# Altium PCB HnWrist.PcbDoc
Units mm, origin at the board's own origin, x right, y up, seen from the top; angles counter-clockwise.
Board outline 28.7 x 41.27 mm, 2 copper layers (Top Layer, Bottom Layer); 73 components, 55 nets, 292 pads, 87 vias.
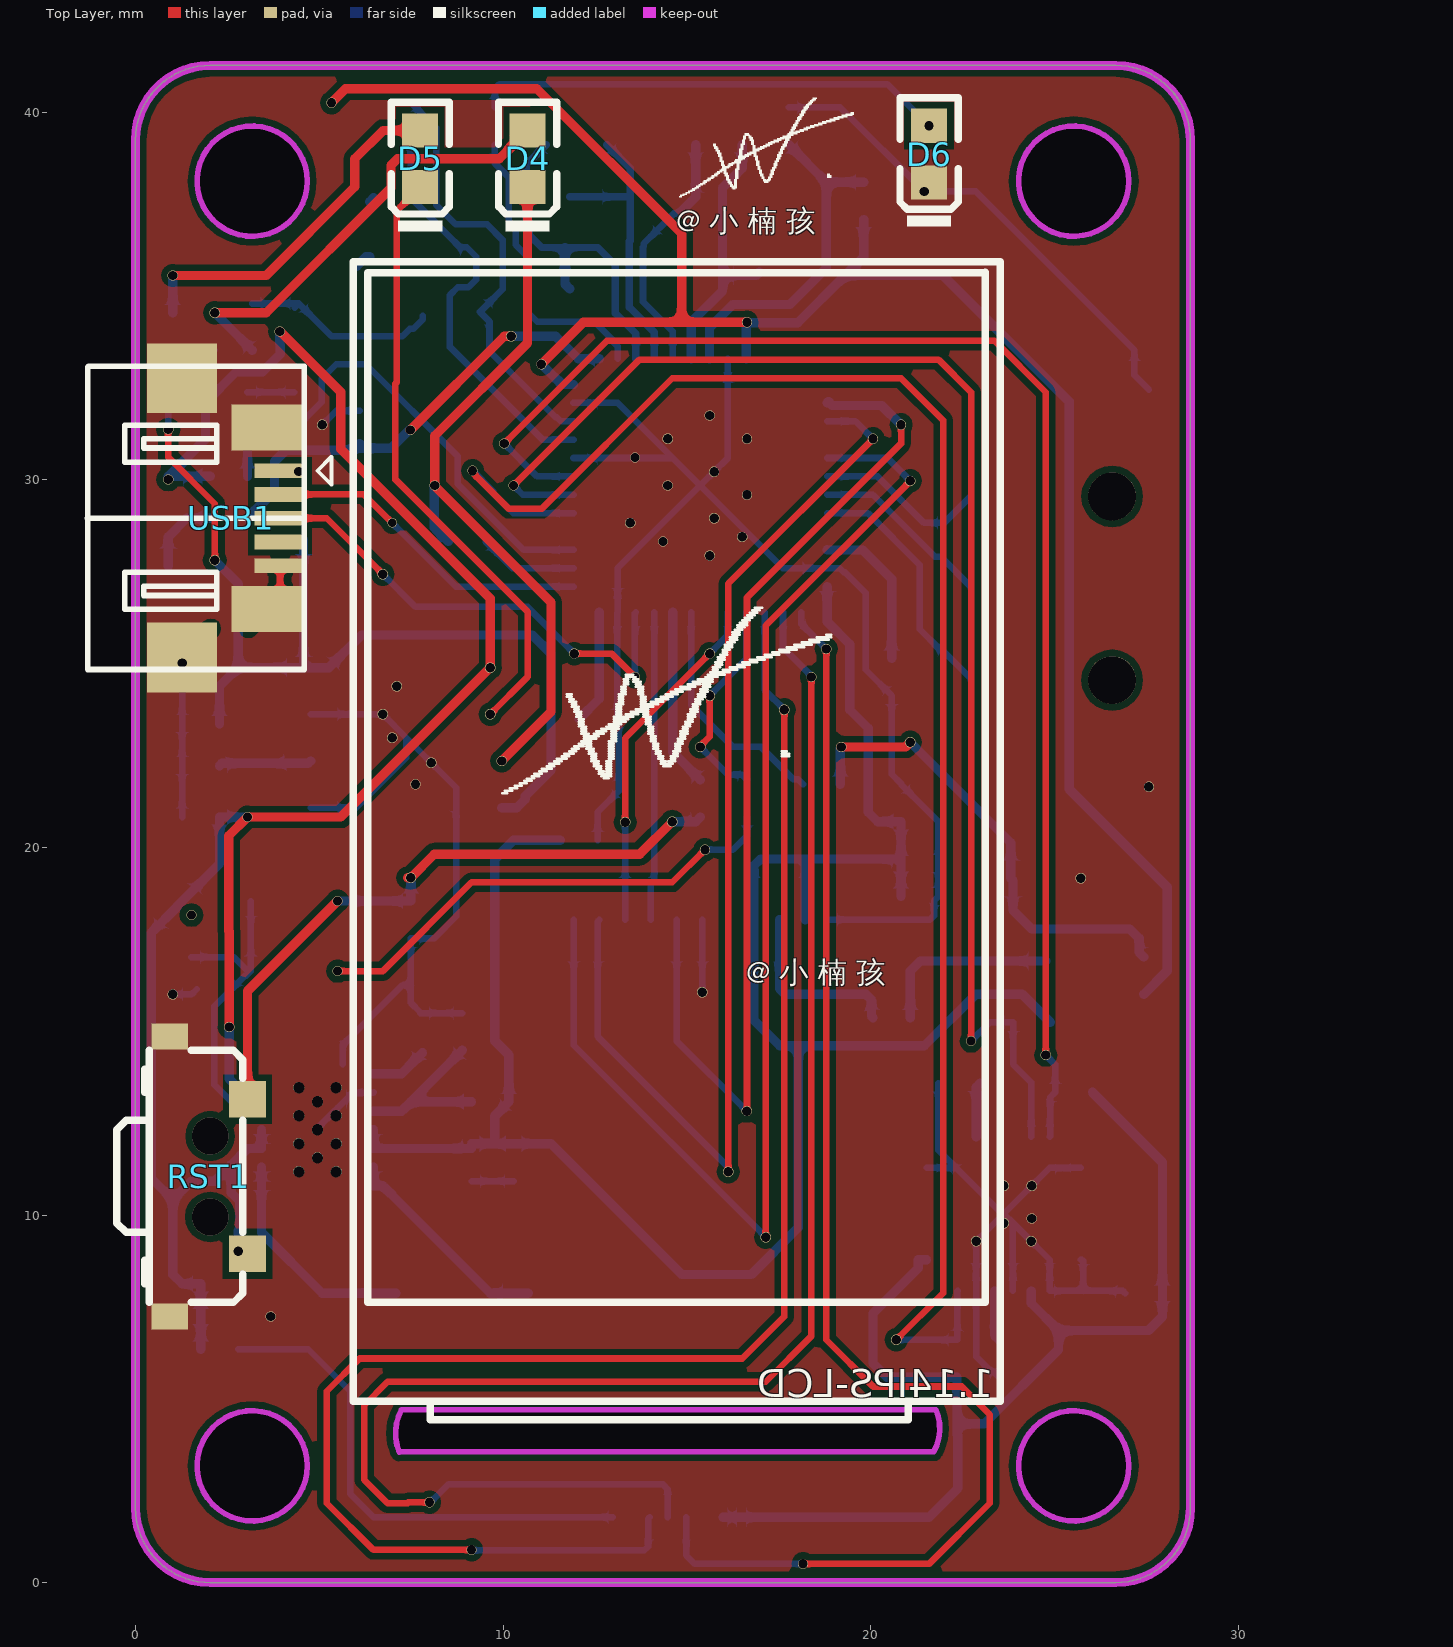
[diagram p0: Top Layer view]
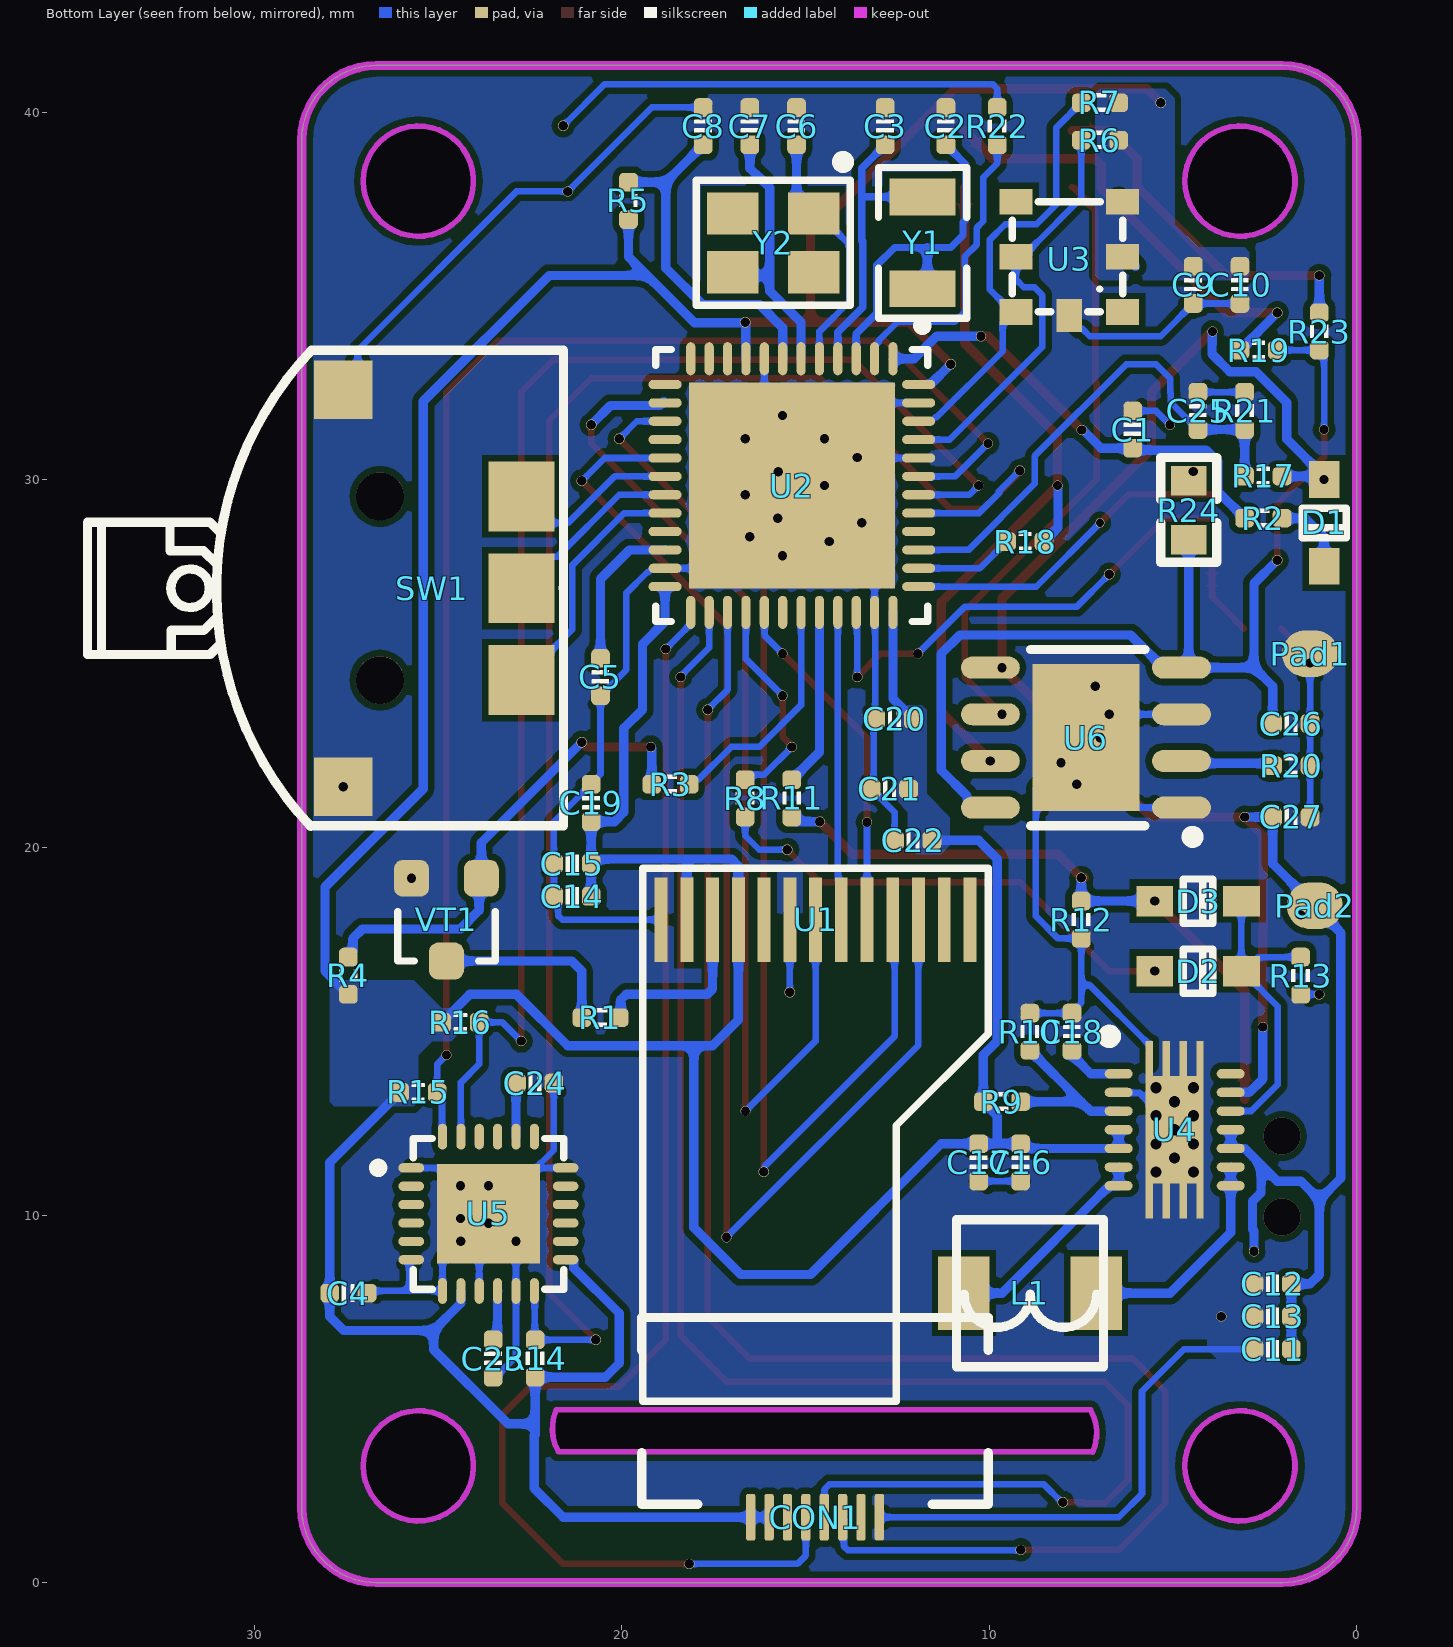
[diagram p1: Bottom Layer view, seen from below]
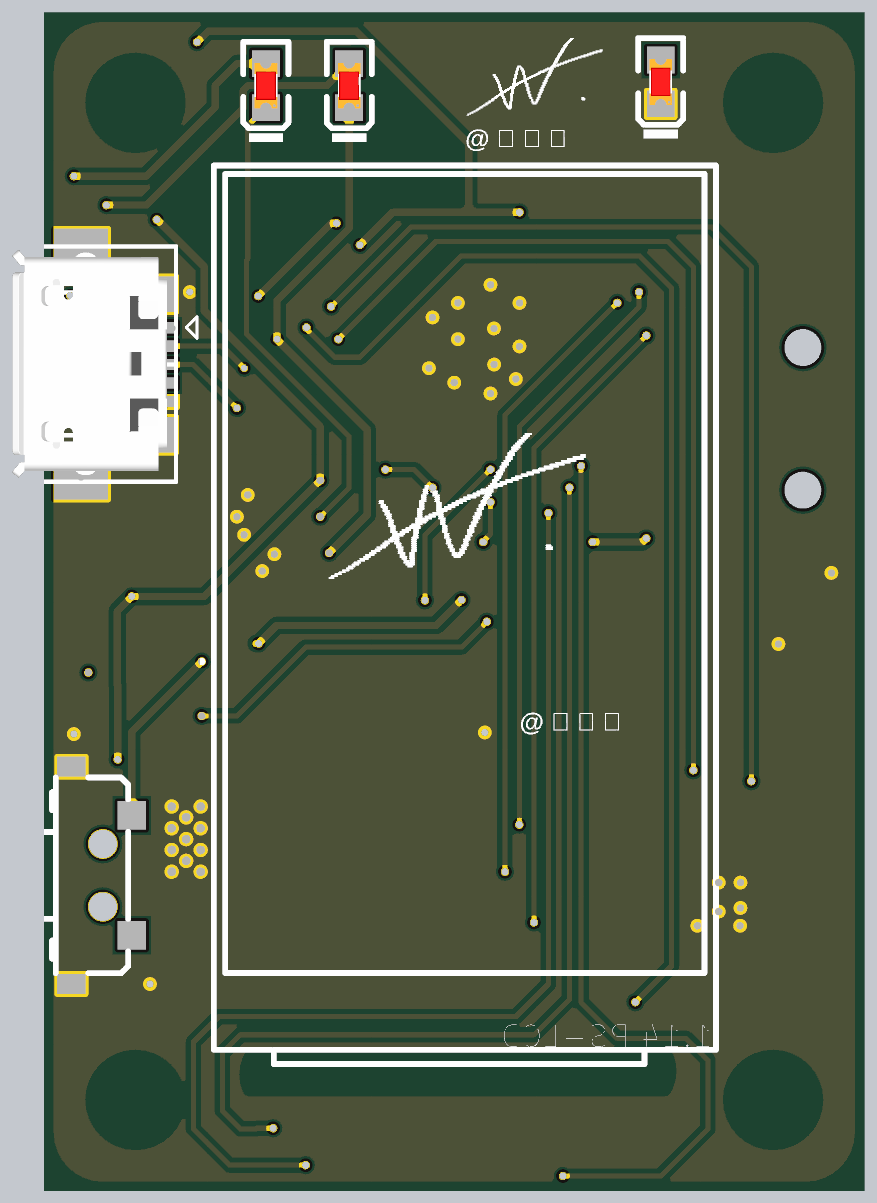
[diagram p2: 3D render of the assembled board from above, using the file's embedded part models]
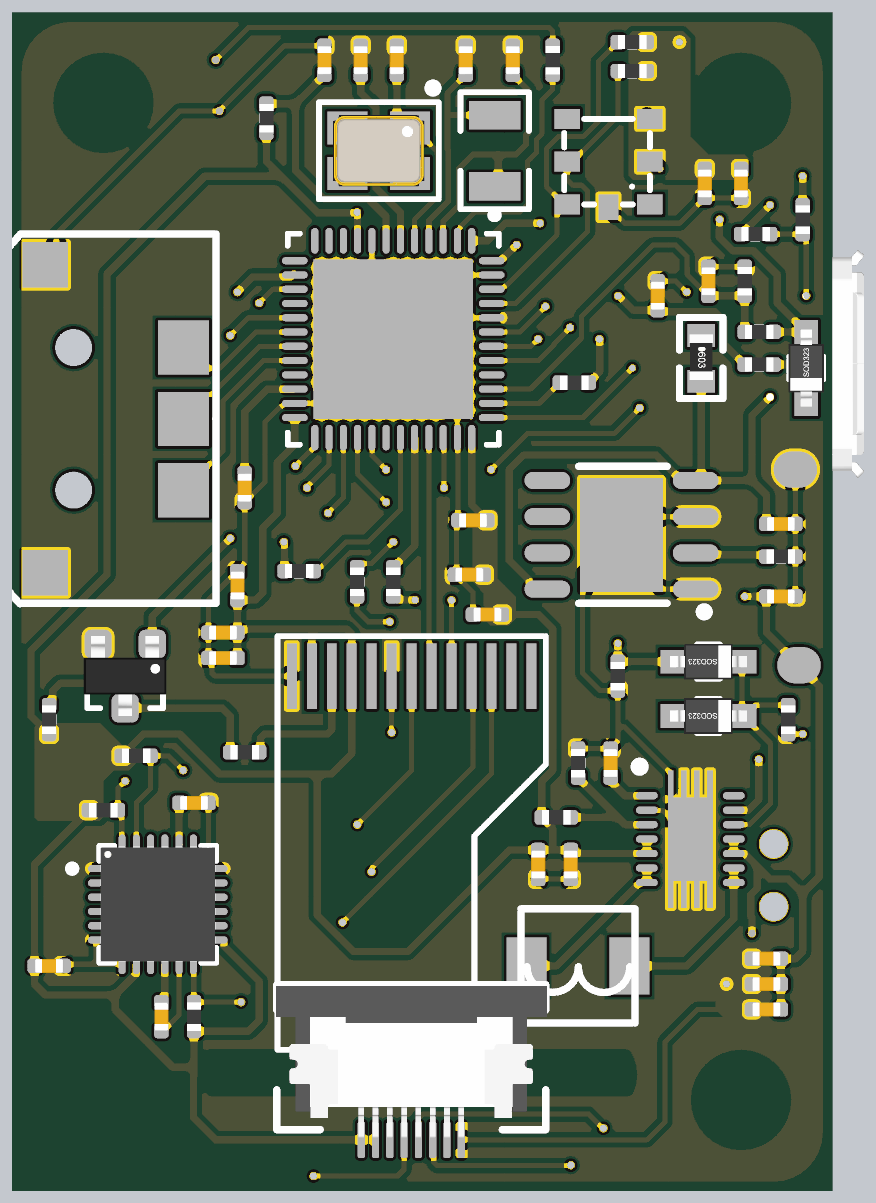
[diagram p3: 3D render of the assembled board from below, using the file's embedded part models]

## Layer stack, top to bottom
Top Solder: solder mask 0.0102, Solder Resist, Dk 3.5
Top Layer: signal copper 0.0356
Dielectric 1: dielectric 0.32, FR-4, Dk 4.8
Bottom Layer: signal copper 0.0356
Bottom Solder: solder mask 0.0102, Solder Resist, Dk 3.5

## Board outline
0,2.032 ccw(c2.032,2.032) 2.032,0 26.67,0 ccw(c26.67,2.032) 28.702,2.032 28.702,39.243 ccw(c26.67,39.243) 26.67,41.275 2.032,41.275 ccw(c2.032,39.243) 0,39.243
cut-out: 1.675,3.175 ccw(c3.175,3.175) 3.175,1.675 ccw(c3.175,3.175) 4.675,3.175 ccw(c3.175,3.175) 3.175,4.675 ccw(c3.175,3.175)
cut-out: 24.027,38.127 ccw(c25.527,38.127) 25.527,36.627 ccw(c25.527,38.127) 27.027,38.127 ccw(c25.527,38.127) 25.527,39.627 ccw(c25.527,38.127)
cut-out: 3.175,36.627 cw(c3.175,38.127) 1.675,38.127 cw(c3.175,38.127) 3.175,39.627 cw(c3.175,38.127) 4.675,38.127 cw(c3.175,38.127)
cut-out: 24.027,3.175 ccw(c25.527,3.175) 25.527,1.675 ccw(c25.527,3.175) 27.027,3.175 ccw(c25.527,3.175) 25.527,4.675 ccw(c25.527,3.175)
cut-out: 7.179,3.552 cw(c8.382,4.064) 7.239,4.699 21.717,4.699 21.777,4.703 cw(c20.574,4.191) 21.717,3.556
cut-out: 7.239,4.699 21.774,4.699 21.777,4.703

## Design rules (kind name [scope] priority, off if disabled: settings)
Clearance [All] p1: gap=0.178 ignorepadtopadclearanceinfootprint=FALSE except(0: Arc-Hole Track-Hole SMDPad-Hole THPad-Hole Via-Hole Fill-Hole Poly-Hole Region-Hole Text-Hole)
HoleSize [All] p1: absolutevalues=TRUE maxlimit=5.08 minlimit=0.305 maxpercent=80.000 minpercent=20.000
HoleToHoleClearance [All] p1: gap=0.305 allowstackedmicrovias=TRUE
MinimumSolderMaskSliver [All] p1: minsoldermaskwidth=0.305
PlaneConnect [All] p1: planeconnectstyle=Direct reliefexpansion=0.508 reliefentries=4 reliefconductorwidth=0.254 reliefairgap=0.254
PolygonConnect [All] p1: connectstyle=Direct reliefconductorwidth=0.254 reliefentries=4 polygonreliefangle="90 Angle" airgapwidth=0.254
RoutingVias [All] p1: holewidth=0.305 width=0.33 viastyle="Through Hole" minholewidth=0.305 minwidth=0.305 maxholewidth=5.08 maxwidth=5.08
SolderMaskExpansion [All] p1: expansion=0.102 istentingtop=FALSE
Width [All] p1: maxlimit=2.54 minlimit=0.178 preferedwidth=0.203
26 further rules are at their usual default settings.

## Classes and differential pairs
net class GND: GND
net class PWR: 3V3 BAT BAT_CHG BAT_DET USB_VCC

## Components (designator, comment, footprint, x,y, rotation, side; value= is the part's Value field where it differs from the comment)
C1 "104" CAP_0402 6.096,31.369 r270 bottom value=0.1u
C2 "22pF" CAP_0402 11.176,39.624 r270 bottom value=0.1u
C3 "22pF" CAP_0402 12.827,39.624 r270 bottom value=0.1u
C4 "1uF" CAP_0402 27.432,7.874 r0 bottom value=0.1u
C5 "4.7uF" CAP_0402 20.574,24.638 r90 bottom value=0.1u
C6 "22pF" CAP_0402 15.24,39.624 r270 bottom value=0.1u
C7 "22pF" CAP_0402 16.51,39.624 r270 bottom value=0.1u
C8 "104" CAP_0402 17.78,39.624 r270 bottom value=0.1u
C9 "4.7uF" CAP_0402 4.445,35.306 r90 bottom value=0.1u
C10 "104" CAP_0402 3.175,35.306 r90 bottom value=0.1u
C11 "106" CAP_0402 2.286,6.35 r0 bottom value=0.1u
C12 "106" CAP_0402 2.286,8.128 r0 bottom value=0.1u
C13 "106" CAP_0402 2.286,7.239 r0 bottom value=0.1u
C14 "106" CAP_0402 21.336,18.669 r0 bottom value=0.1u
C15 "22uF" CAP_0402 21.336,19.558 r0 bottom value=0.1u
C16 "22uF" CAP_0402 9.144,11.43 r270 bottom value=0.1u
C17 "104" CAP_0402 10.287,11.43 r270 bottom value=0.1u
C18 "104" CAP_0402 7.747,14.986 r270 bottom value=0.1u
C19 "1uF" CAP_0402 20.828,21.209 r90 bottom value=0.1u
C20 "1uF" CAP_0402 12.573,23.495 r180 bottom value=0.1u
C21 "1uF" CAP_0402 12.7,21.59 r180 bottom value=0.1u
C22 "1uF" CAP_0402 12.065,20.193 r0 bottom value=0.1u
C23 "104" CAP_0402 23.495,6.096 r90 bottom value=0.1u
C24 "2.2nF" CAP_0402 22.352,13.589 r0 bottom value=0.1u
C25 "104" CAP_0402 4.318,31.877 r90 bottom value=0.1u
C26 "106" CAP_0402 1.778,23.368 r0 bottom value=0.1u
C27 "106" CAP_0402 1.778,20.828 r0 bottom value=0.1u
CON1 "MAX30102" FFC_0.5_8 14.736,4.039 r0 bottom
D1 "1N4148" LC-SOD-323 0.889,28.829 r90 bottom
D2 "1N4148" LC-SOD-323 4.318,16.637 r0 bottom
D3 "1N4148" LC-SOD-323 4.318,18.542 r0 bottom
D4 "红灯 0603" LC-0603_LED_S1 10.668,38.735 r90 top
D5 "绿灯 0603" LC-0603_LED_S1 7.747,38.735 r90 top
D6 "红灯 0603" LC-0603_LED_S1 21.59,38.862 r90 top
L1 "1.5uH" 变压器电感_0420 8.89,7.874 r90 bottom locked
Pad1 "BAT" PAD_A 1.27,25.273 r180 bottom
Pad2 "BAT" PAD_A 1.143,18.415 r180 bottom
R1 "10R" RES_0402 20.574,15.367 r0 bottom value=22R
R2 "10K" RES_0402 2.54,28.956 r180 bottom value=22R
R3 "1K" RES_0402 18.669,21.717 r180 bottom value=22R
R4 "20K" RES_0402 27.432,16.51 r270 bottom value=22R
R5 "47K" RES_0402 19.812,37.592 r270 bottom value=22R
R6 "4.7K" RES_0402 6.985,39.243 r180 bottom value=22R
R7 "4.7K" RES_0402 6.985,40.259 r180 bottom value=22R
R8 "4.7K" RES_0402 16.637,21.336 r90 bottom value=22R
R9 "1M" RES_0402 9.652,13.081 r180 bottom value=22R
R10 "180K" RES_0402 8.89,14.986 r90 bottom value=22R
R11 "20K" RES_0402 15.367,21.336 r270 bottom value=22R
R12 "20K" RES_0402 7.493,18.034 r270 bottom value=22R
R13 "1M" RES_0402 1.524,16.51 r270 bottom value=22R
R14 "10K" RES_0402 22.352,6.096 r270 bottom value=22R
R15 "10K" RES_0402 25.527,13.335 r0 bottom value=22R
R16 "10K" RES_0402 24.384,15.24 r0 bottom value=22R
R17 "20K" RES_0402 2.54,30.099 r0 bottom value=22R
R18 "2K" RES_0402 9.017,28.321 r180 bottom value=22R
R19 "2K" RES_0402 2.667,33.528 r180 bottom value=22R
R20 "2K" RES_0402 1.778,22.225 r180 bottom value=22R
R21 "20K" RES_0402 3.048,31.877 r90 bottom value=22R
R22 "1K" RES_0402 9.779,39.624 r90 bottom value=22R
R23 "10K" RES_0402 1.016,34.036 r90 bottom value=22R
R24 "0R" 0603R 4.572,29.972 r270 bottom value=22R
RST1 "KEY" 侧面按键3*6*3.5 2.032,11.049 r90 top locked
SW1 "三档拨轮开关" SW-SMD 25.146,27.051 r90 bottom locked
U1 "IPS-LCD" 1.14IPS-LCD 31.923,11.334 r270 top locked
U2 "STM32F401CCU6" STM-UFQFPN48_N 15.367,29.845 r270 bottom locked
U3 "BMP180" LGA-7 11.371,33.568 r270 bottom locked
U4 "TPS63020" TPS63020 4.953,12.319 r270 bottom locked
U5 "MPU6050" QFN-24 23.622,10.033 r180 bottom
U6 "TP4056" LC-SOP-8_EP_150MIL 7.366,22.987 r90 bottom
USB1 "Micro-USB" USB-MICRO_A 3.937,30.251 r270 top locked
VT1 "S8050" SMT_TRIODE_NPN 24.765,18.034 r0 bottom
Y1 "32.768KHz" "LC-SMD-3215_2P FC - 135" 11.811,36.449 r90 bottom
Y2 "25MHZ" LC-SMD-3225_4P 15.875,36.449 r0 bottom locked

## Footprints (in the part's own frame and the unit in brackets; to place one, negate y for a bottom-side part, rotate by r counter-clockwise, add the part's x,y. Pads: shape width x height; smd on the part's side, far side on the other; paste and mask are expansions set on the pad)
1.14IPS-LCD [mm] "1.14寸IPS-LCD裸屏SPI接口"
  rect 2.3x0.35 smd far side: 1(-6.7,-21.4) 2(-6.7,-20.7) 3(-6.7,-20) 4(-6.7,-19.3) 5(-6.7,-18.6) 6(-6.7,-17.9) 7(-6.7,-17.2) 8(-6.7,-16.5) 9(-6.7,-15.8) 10(-6.7,-15.1) 11(-6.7,-14.4) 12(-6.7,-13.7) 13(-6.7,-13)
  silkscreen extent -24.6,-26 6.9,-8.4
0603R [mm]
  rect 0.8x0.965 smd: 1(0,0) 2(1.6,0)
  silkscreen extent -0.64,-0.76 2.21,0.76, body extent -0.04,-0.41 1.56,0.41, height 0.45
CAP_0402 [mil]
  rrect50% 20x20 smd: 1(-20,0) 2(20,0)
  silkscreen extent -7,-9 7,9, body extent -20,-10 20,10, height 20
FFC_0.5_8 [mil]
  rrect50% 10x50 smd: 1(-68.9,89) 2(-49.21,89) 3(-29.53,89) 4(-9.84,89) 5(9.84,89) 6(29.53,89) 7(49.21,89) 8(68.9,89)
  silkscreen extent -186,-125 186,75, body extent -187,-124 187,87, height 82
LC-0603_LED_S1 [mm]
  rect 0.93x0.98 smd: A(0.77,0) K(-0.77,0)
  silkscreen extent -1.97,-0.79 1.54,0.79, body extent -0.8,-0.4 0.8,0.4, height 0.6
"LC-SMD-3215_2P FC - 135" [mm]
  rect 1x1.8 smd: 1(-1.25,0) 2(1.25,0)
  silkscreen extent -2.05,-1.2 2.05,1.2
LC-SMD-3225_4P [mm]
  rect 1.4x1.15 smd: 1(-1.1,-0.8) 2(1.1,-0.8) 3(1.1,0.8) 4(-1.1,0.8)
  silkscreen extent -2.1,-2.35 2.1,1.7, body extent -1.6,-1.25 1.6,1.25, height 0.61
LC-SOD-323 [mm]
  rect 1x0.83 smd: 1(1.18,0) 2(-1.18,0)
  silkscreen extent -0.4,-0.6 0.4,0.6, body extent -1.35,-0.63 1.35,0.63, height 1.1
LC-SOP-8_EP_150MIL [mm]
  rect 4x2.9 smd: 0(0,0)
  oval 0.6x1.6 smd: 1(-1.905,-2.6) 2(-0.635,-2.6) 3(0.635,-2.6) 4(1.905,-2.6) 5(1.905,2.6) 6(0.635,2.6) 7(-0.635,2.6) 8(-1.905,2.6)
  silkscreen extent -2.85,-3.05 2.4,1.5
LGA-7 [mm] "LGA-7Pin"
  rect 0.7x0.9 smd: 1(-1,5) 2(-2.5,5) 3(-4,5) 4(-4,2.1) 5(-2.5,2.1) 6(-1,2.1)
  rect 0.9x0.7 smd: 7(-0.9,3.55)
  silkscreen extent -4,2 -1,5
PAD_A [mil]
  oval 60x50 smd: 1(0,0)
QFN-24 [mm]
  oval 0.7x0.25 smd: 1(-2.1,1.25) 2(-2.1,0.75) 3(-2.1,0.25) 4(-2.1,-0.25) 5(-2.1,-0.75) 6(-2.1,-1.25) 13(2.1,-1.25) 14(2.1,-0.75) 15(2.1,-0.25) 16(2.1,0.25) 17(2.1,0.75) 18(2.1,1.25)
  oval 0.25x0.7 smd: 7(-1.25,-2.1) 8(-0.75,-2.1) 9(-0.25,-2.1) 10(0.25,-2.1) 11(0.75,-2.1) 12(1.25,-2.1) 19(1.25,2.1) 20(0.75,2.1) 21(0.25,2.1) 22(-0.25,2.1) 23(-0.75,2.1) 24(-1.25,2.1)
  rect 2.8x2.7 smd: ""(0,0)
  silkscreen extent -3.13,-2.05 2.05,2.05, body extent -2.02,-2.02 2.02,2.02, height 0.95
RES_0402 [mil]
  rrect50% 20x20 smd: 1(-20,0) 2(20,0)
  silkscreen extent -6,-10 6,10, body extent -20,-10 20,10, height 14
SMT_TRIODE_NPN [mm]
  rrect50% 0.95x1 smd: 1(-0.95,-1.125) 2(0.95,-1.125) 3(0,1.125)
  silkscreen extent -1.33,-0.22 1.32,1.13, body extent -1.45,-1.4 1.45,1.4, height 1.3
STM-UFQFPN48_N [mm] "QFN, 48-Leads, Body 7.1x7.1mm, Pitch 0.5mm, Thermal Pad 5.6x5.6mm, IPC Medium Density"
  oval 0.9x0.25 smd: 1(-3.45,2.75) 2(-3.45,2.25) 3(-3.45,1.75) 4(-3.45,1.25) 5(-3.45,0.75) 6(-3.45,0.25) 7(-3.45,-0.25) 8(-3.45,-0.75) 9(-3.45,-1.25) 10(-3.45,-1.75) 11(-3.45,-2.25) 12(-3.45,-2.75) 25(3.45,-2.75) 26(3.45,-2.25) 27(3.45,-1.75) 28(3.45,-1.25) 29(3.45,-0.75) 30(3.45,-0.25) 31(3.45,0.25) 32(3.45,0.75) 33(3.45,1.25) 34(3.45,1.75) 35(3.45,2.25) 36(3.45,2.75)
  oval 0.25x0.9 smd: 13(-2.75,-3.45) 14(-2.25,-3.45) 15(-1.75,-3.45) 16(-1.25,-3.45) 17(-0.75,-3.45) 18(-0.25,-3.45) 19(0.25,-3.45) 20(0.75,-3.45) 21(1.25,-3.45) 22(1.75,-3.45) 23(2.25,-3.45) 24(2.75,-3.45) 37(2.75,3.45) 38(2.25,3.45) 39(1.75,3.45) 40(1.25,3.45) 41(0.75,3.45) 42(0.25,3.45) 43(-0.25,3.45) 44(-0.75,3.45) 45(-1.25,3.45) 46(-1.75,3.45) 47(-2.25,3.45) 48(-2.75,3.45)
  rect 5.6x5.6 smd: 49(0,0)
  silkscreen extent -4.47,-3.7 3.7,3.7, body extent -3.55,-3.55 3.55,3.55, height 0.6
SW-SMD [mm]
  rect 1.6x1.6 smd: a(-5.4,2.425) a(5.4,2.425)
  rect 1.9x1.8 smd: b(2.5,-2.425) c(0,-2.425) d(-2.5,-2.425)
  round 1.3 hole 1.3 unplated: ""(-2.5,1.425) ""(2.5,1.425)
  silkscreen extent -6.48,-3.57 6.48,9.39
TPS63020 [mil] "High Efficiency Single Inductor Buck-Boost Converter With 4-A Switches"
  oval 10x30 smd: 1(-60,-60) 2(-40,-60) 3(-20,-60) 4(0,-60) 5(20,-60) 6(40,-60) 7(60,-60) 8(60,60) 9(40,60) 10(20,60) 11(0,60) 12(-20,60) 13(-40,60) 14(-60,60)
  rect 50x7.87 smd: 15(-70,-27.17) 15(-70,-9.06) 15(-70,9.06) 15(-70,27.17) 15(70,-27.17) 15(70,-9.06) 15(70,9.06) 15(70,27.17)
  round 11.81 hole 11.81: 15(-45,-20) 15(-45,20) 15(-30,0) 15(-15,-20) 15(-15,20) 15(0,0) 15(15,-20) 15(15,20) 15(30,0) 15(45,-20) 15(45,20)
  rect 115x62.2 smd: 15(0,0)
  silkscreen extent -105,-75 -95,-65, body extent -85,-65 85,65, height 30
USB-MICRO_A [mm]
  rect 1.9x1.9 smd: 0(-2.515,-2.667) 0(5.08,-2.667)
  rect 0.4x1.4 smd: 1(0,0) 2(0.648,0) 3(1.295,0) 4(1.943,0) 5(2.591,0)
  rect 1.25x2 smd: 5(-1.168,-0.33) 5(3.759,-0.33)
  silkscreen extent -2.84,-5.24 5.41,1.4, body extent -2.71,-5.08 5.25,0.34, height 2.69
侧面按键3*6*3.5 [mm]
  rect 1x1 smd: 1(-2.1,-1.016) 2(2.1,-1.016)
  rect 0.7x1 smd: 4(-3.81,1.1) 5(3.81,1.1)
  silkscreen extent -3.43,-0.89 3.43,2.54, body extent -3.43,-0.89 3.43,1.65, height 4
变压器电感_0420 [mm]
  rect 2x1.4 smd: 1(0,-1.8) 2(0,1.8)
  silkscreen extent -2,-2 2,2

## Part data
C1 C2 C3 C4 C5 C6 C7 C8 C9 C10 C11 C12 C13 C14 C15 C16 C17 C18 C19 C20 C21 C22 C23 C24 C25 C26 C27: library part 电容-0402, "Capacitor"
CON1: library part FFC_0.5_8, System=Connector
D1 D2 D3: library part "SOD-323 1N4148WS T4", "二极管", Package=SOD-323, SuppliersPartNumber=C2128, ComponentLink1Description=供应商链接, ComponentLink1URL=http://www.szlcsc.com/product/details_2485.html, Supplier=LC
D4 D6: library part "0603 红灯", "发光二极管", Package=0603, SuppliersPartNumber=C2286, ComponentLink1Description=供应商链接, ComponentLink1URL=http://www.szlcsc.com/product/details_2659.html, Supplier=LC
D5: library part "0603 绿灯", "发光二极管", Package=0603, SuppliersPartNumber=C72043, ComponentLink1Description=供应商链接, ComponentLink1URL=http://www.szlcsc.com/product/details_73152.html, Supplier=LC
L1: library part "Inductor Iron 2", _Current=10A, _Accuracy=20%, _Comma=,, _Footprint=1040, _Name=IND, _Specification=IND,1040,1.5uH,10A,20%, _Value=1.5uH
Pad1 Pad2: library part Pad, _Comma=,, _Funcyusa=Test, _Name=Pad, _Remarks=BAT, _Specification=Pad,Test,BAT
R1 R2 R3 R4 R5 R6 R7 R8 R9 R10 R11 R12 R13 R14 R15 R16 R17 R18 R19 R20 R21 R22 R23 R24: library part 电阻-0402, "Resistor"
RST1: library part SW-PB, "按键"
SW1: library part 拨轮开关, "拨轮开关", BOM_JLCPCB Part Class="Extended Part", BOM_Manufacturer="XKB Enterprise", BOM_Manufacturer Part=TM-2022-3, BOM_Supplier=LCSC, BOM_Supplier Part=C318952, Contributor=LCSC, spicePre=S, spiceSymbolName=TM-2022-3
U1: library part IPS-LCD-1.14, "IPS-LCD-1.14寸裸屏spi接口"
U2: "ARM Cortex-M4 32-bit MCU+FPU, 105 DMIPS, 256 kB Flash, 64 kB Internal RAM, 36 I/Os, 48-pin UFQFPN, -40 to 85 degC, Tray", I/Os (High Current)=36, Manufacturer=STMicroelectronics, Operating Frequency(F) (Processor speed) (MHz)=84, Supplier Part Number 1=19X6217, Supply Voltage(Vcc) max (V)=3.6, Supply Voltage(Vcc) min (V)=1.8, ComponentLink1Description="Manufacturer URL", ComponentLink1URL=http://www.st.com/web/en/home.html, ComponentLink2Description=Datasheet, ComponentLink2URL=http://www.st.com/st-web-ui/static/active/en/resource/technical/document/data_brief/DM00071938.pdf, ComponentLink3Description="Package Specification", ComponentLink3URL=http://www.st.com/st-web-ui/static/active/en/resource/technical/document/data_brief/DM00071938.pdf, Core="ARM Cortex-M4", DatasheetVersion="Rev. 1", FLASH Size (Prog) (kB)=256, Internal RAM Size (kB)=64, Mounting Technology="Surface Mount", PackageDescription="48-Pin Ultra Thin Fine Pitch Quad Flat No-Lead, 7 x 7 x 0.6 mm Body, 0.5 mm Pitch, Exposed Pad", PackageReference=UFQFPN48, PackageVersion="Rev. 1, 04/2013", Packing=Tray, PartNumber=STM32F401CCU6, Supplier 1=Newark, Supplier 2=Mouser, Supplier Part Number 2=511-STM32F401CCU6
U3: "数字气压传感器"
U5: "六轴传感器"
U6: "电池电源管理", Package=SOP-8_EP_150mil, SuppliersPartNumber=C16581, ComponentLink1Description=供应商链接, ComponentLink1URL=http://www.szlcsc.com/product/details_17264.html, Supplier=LC
VT1: library part SMT_TRIODE_NPN, "Surface mount NPN transistor, package SOT-23"
Y1: library part "SMD-3215_2P 32.768KHz 20ppm 12.5pF", "贴片晶振", Package=SMD-3215_2P, SuppliersPartNumber=C32346, ComponentLink1Description=供应商链接, ComponentLink1URL=http://www.szlcsc.com/product/details_33310.html, Supplier=LC
Y2: library part "SMD-3225_4P  25MHZ 12PF 10PPM", "贴片晶振", Package=SMD-3225_4P, SuppliersPartNumber=C9006, ComponentLink1Description=供应商链接, ComponentLink1URL=http://www.szlcsc.com/product/details_9526.html, Supplier=LC

## Via types
v1: diameter 0.279, hole 0.254, Top Layer to Bottom Layer, 84 vias
v2: diameter 1, hole 1, Top Layer to Bottom Layer, 2 vias
v3: diameter 0.254, hole 0.229, Top Layer to Bottom Layer, 1 vias

## Nets (pads, with @x,y where several pads share a name; then routed paths per layer and width w, separated by ;. In a path a pad name is that pad's centre, name@x,y a point inside that pad or via, vN(x,y) a via of type N, cw(c..) or ccw(c..) an arc to the next point about the centre after c; other vN are vias at no path point)
3V3: C4.2 C9.2 C10.2 C14.1 C15.1 C16.1 C17.1 C19.1 C20.2 C21.2 C22.1 CON1.7 CON1.8 R4.2 R5.2 R6.2 R7.2 R9.1 R14.2 R15.2 R16.2 U1.10 U1.12 U2.9 U2.24 U2.36 U2.48 U3.2 U3.3 U4.4 U4.5 U5.8 U5.13 | length 144.7
  Top Layer w0.254: v1(5.334,40.259) 5.715,40.64 10.919,40.64 14.859,36.7 14.859,34.29 ; v1(11.044,33.147) 12.187,34.29 14.859,34.29 ; v1(16.637,34.29) 14.859,34.29
  Bottom Layer w0.254: U3.2@6.017,35.814 6.271,36.068 U3.2 ; U3.3 U3.3@6.477,37.674 ; U4.4 U4.5 C16.1@9.144,11.811 ; C16.1 9.716,11.938 ; v1(11.044,33.147) 11.596,32.595 U2.48 ; C22.1 10.287,20.193 9.779,19.685 9.779,14.732 10.16,14.351 R9.1 9.779,12.7 9.779,12.002 9.716,11.938 ; C20.2 12.617,24.047 U2.36 ; CON1.7 CON1.8 21.59,1.778 22.374,2.562 22.374,4 22.352,4.022 22.352,4.318 ; U2.9 16.619,33.297 16.619,34.265 v1@16.644,34.29 ; v1(16.637,34.29) v1@16.644,34.29 ; U1.12 18.223,19.536 18.074,19.685 ; U2.24 18.817,26.144 19.431,25.529 19.431,23.749 19.939,23.241 19.939,20.955 20.193,20.701 C19.1 C15.1 ; R5.2 19.812,36.068 19.304,35.56 ; C14.1 C15.1 ; U5.13 21.301,8.783 21.299,8.781 21.299,8.56 20.066,7.327 20.066,5.969 20.447,5.588 R14.2 22.352,4.318 ; U5.8 24.374,7.931 24.374,7.598 25.114,6.858 ; R16.2 24.13,16.002 22.86,16.002 21.463,14.605 18.034,14.605 ; R15.2 27.94,11.43 C4.2 27.94,7.239 27.559,6.858 25.114,6.858 ; R4.2 28.067,16.637 28.067,18.923 25.4,21.59 25.4,32.131 21.971,35.56 19.304,35.56 ; 9.716,11.938 C17.1 11.303,11.938 14.859,8.382 16.758,8.382 18.034,9.658 18.034,14.605 ; v1@16.644,34.29 16.66,34.274 18.018,34.274 19.304,35.56 ; 18.034,14.605 17.526,14.605 16.823,15.308 U1.10 16.823,19.499 17.009,19.685 18.074,19.685 ; 18.074,19.685 20.701,19.685 C15.1 ; 22.352,4.318 23.09,4.318 25.114,6.343 25.114,6.858
BAT: C11.1 C12.1 C13.1 C27.2 D1.1 Pad2.1 R17.1 RST1.1 U4.10 U4.11 U4.13 U6.5 | length 58.2
  Top Layer w0.254: v1(2.553,15.113) 2.553,17.714 2.54,17.726 2.54,20.32 v1(3.048,20.828) 5.588,20.828 v1(9.652,24.892) 9.652,26.773 5.584,30.84 5.584,32.389 3.937,34.036 v1(3.924,34.036)
  Bottom Layer w0.254: D1.1@1.177,30.297 D1.1@0.979,30.099 ; C11.1 C13.1 C12.1 1.27,8.128 1.016,8.382 1.016,10.414 ; R17.1 D1.1@0.979,30.099 ; v1(2.553,15.113) 2.553,13.703 2.921,13.335 U4.13 ; v1(2.794,9.017) 2.794,9.573 2.837,9.616 2.837,10.374 2.603,10.608 2.603,11.367 ; v1(3.048,20.828) C27.2 2.286,19.558 Pad2.1 1.143,18.393 0.432,17.682 0.432,10.998 1.016,10.414 ; U4.11 U4.10 3.048,11.811 2.603,11.367 ; v1(3.924,34.036) 3.929,34.031 3.929,33.687 3.937,33.679 3.937,33.425 3.455,32.944 2.742,32.944 1.905,32.107 1.905,31.11 0.889,30.094 v1(0.889,30.009) D1.1@0.979,30.099 ; 1.016,10.414 1.524,10.922 2.159,10.922 2.603,11.367
  other v1: 1.524,18.161
BAT_CHG: R18.1 U2.38 | length 2.7
  Bottom Layer w0.178: R18.1 10.251,27.595 U2.38
BAT_DET: C25.1 R17.2 R21.1 U2.39 | length 13.8
  Bottom Layer w0.178: C25.1 4.826,31.877 5.062,32.113 5.062,32.367 5.067,32.372 5.067,32.753 5.461,33.147 6.264,33.147 8.763,30.648 8.763,29.894 10.562,28.095 U2.39
  Bottom Layer w0.254: R17.2 R21.1 C25.1
BMP180_SCL: R6.1 U2.45 U3.5 | length 11.3
  Bottom Layer w0.178: R6.1 7.493,37.666 8.83,36.329 9.01,36.329 U3.5 9.271,35.451 9.06,35.24 8.766,35.24 8.554,35.028 8.554,33.615 11.074,31.095 U2.45
BMP180_SDA: R7.1 U2.46 U3.6 | length 11.7
  Bottom Layer w0.178: R7.1 8.178,39.574 8.178,37.484 8.711,36.951 9.565,36.951 9.988,36.528 9.988,35.185 9.371,34.568 9.632,34.307 9.632,33.501 11.43,31.703 11.464,31.703 11.572,31.595 U2.46
CPOUT: C24.2 U5.20 | length 1.5
  Bottom Layer w0.254: U5.20 22.874,12.135 22.874,13.476 C24.2@22.987,13.589
EN: R11.1 U2.32 | length 4.9
  Bottom Layer w0.254: U2.32 14.617,22.594 R11.1
GND: C1.1 C2.1 C3.1 C4.1 C5.1 C6.1 C7.1 C8.1 C9.1 C10.1 C11.2 C12.2 C13.2 C14.2 C15.2 C16.2 C17.2 C18.1 C19.2 C20.1 C21.1 C22.2 C23.1 C24.1 C25.2 C26.1 C27.1 CON1.1 D6.K Pad1.1 R10.2 R12.2 R13.2 R20.2 R21.2 RST1.4 RST1.5 SW1.a U1.8 U1.13 U2.8 U2.23 U2.35 U2.44 U2.47 U2.49 U3.7 U4.2 U4.15 U5. U5.1 U5.6 U5.7 U5.9 U5.11 U5.18 U6.0 U6.1 U6.3 USB1.0 USB1.5 VT1.2 | length 128.5
  Top Layer w0.178: USB1.0@1.27,25.171 USB1.0@2.055,25.956 ; USB1.5@3.071,25.956 3.607,26.492 3.937,26.822 USB1.5@3.937,27.661
  Bottom Layer w0.178: v1(1.016,16.002) R13.2 R13.2@1.666,16.144 ; C27.1 R20.2 C26.1 v1(1.27,25.019) Pad1.1 ; C11.2 4.699,6.35 5.842,5.207 5.842,2.413 6.477,1.778 CON1.1 ; R21.2 C25.2 ; C10.1 C9.1 ; C9.1@4.331,34.684 C9.1 ; U6.1 6.005,21.082 7.366,22.443 U6.0 ; U6.3 v1(6.731,23.622) U6.0 ; U4.15@4.953,12.319 4.953,12.365 5.909,13.32 6.462,13.32 U4.2 ; v1(5.08,31.496) 5.461,31.877 C1.1 ; U4.15@5.643,14.097 5.643,14.632 7.267,16.256 7.493,16.256 ; U3.7 7.821,34.368 7.56,34.107 7.46,34.107 7.262,33.909 5.334,33.909 C9.1 ; R10.2 C18.1 7.747,15.515 7.493,15.769 7.493,16.256 ; C16.2 C17.2 ; U2.44 U2.49@14.617,30.595 ; U2.47 13.117,32.095 U2.49@14.617,30.595 ; C22.2 12.573,20.955 C21.1@13.144,21.526 ; C21.1 C21.1@13.144,21.526 ; v1(15.423,16.058) U1.8 ; U2.8 16.117,30.595 v1(15.742,30.22) U2.49 ; C8.1 19.177,40.132 v1(21.463,37.846) 22.86,37.846 27.178,33.528 27.178,32.844 SW1.a@27.571,32.451 ; U1.13 21.613,18.034 21.727,18.148 21.727,18.552 C14.2 C15.2 21.844,20.701 C19.2 20.828,21.738 20.574,21.992 C5.1 19.868,24.836 19.868,26.923 19.304,27.487 19.27,27.487 19.162,27.595 U2.23 17.617,27.595 U2.49 ; U5.18 U5.@22.322,11.283 ; C24.1 21.844,11.761 U5.@22.322,11.283 ; 22.872,6.995 U5.11 v1(22.872,9.283) U5. ; 22.873,6.994 22.873,6.147 23.29,5.73 23.353,5.73 C23.1 ; U5.9 U5.@23.872,9.783 ; U5.6 25.748,8.783 25.781,8.75 25.781,7.933 ; U5.1 24.872,11.283 U5. ; C4.1 26.865,7.933 25.781,7.933 ; U6.0 8.727,21.626 8.727,18.125 8.128,17.526 R12.2 7.493,16.256 ; C21.1@13.144,21.526 13.144,23.431 C20.1 13.103,23.517 13.103,26.381 U2.35 13.117,27.595 U2.49 ; U2.49@14.617,30.595 U2.49 ; U5.@22.322,11.283 23.572,10.033 U5. ; U5. U5.@23.872,9.783 ; U5.@23.872,9.783 24.872,8.783 U5.7 25.781,7.933
  other v1: 3.683,7.239 24.372,9.283 23.622,9.779 24.384,9.906 23.622,10.795 24.384,10.795 25.715,19.159 27.571,21.651 7.62,21.717 8.047,22.306 6.985,22.987 7.112,24.384 15.621,27.94 14.351,28.321 16.51,28.448 13.462,28.829 15.748,28.956 16.637,29.591 14.478,29.845 13.589,30.607 14.478,31.115 16.637,31.115 15.621,31.75
KEY1: SW1.b U2.18 | length 4.7
  Bottom Layer w0.178: U2.18 20.191,30.095 21.457,28.829 21.999,28.829 SW1.b
KEY2: SW1.c U2.19 | length 5
  Bottom Layer w0.178: U2.19 20.062,29.595 21.745,27.912 21.91,27.912 22.721,27.101 SW1.c
KEY3: SW1.d U2.20 | length 6.8
  Bottom Layer w0.178: U2.20 19.927,29.095 21.336,27.686 21.336,25.936 21.86,25.412 21.91,25.412 22.721,24.601 SW1.d
LED: R22.1 U2.2 | length 8.1
  Bottom Layer w0.178: R22.1 9.779,38.608 10.16,38.227 10.16,37.034 10.343,36.851 10.343,36.393 10.668,36.068 10.668,35.833 10.644,35.809 10.644,34.589 10.93,34.303 12.488,34.303 13.009,33.782 13.009,33.748 13.117,33.64 U2.2
MAX30102_INT: CON1.3 U2.27 | length 45.8
  Top Layer w0.178: v1(9.144,0.889) 6.477,0.889 5.207,2.159 5.207,5.207 6.096,6.096 16.51,6.096 17.653,7.239 v1(17.653,23.749)
  Bottom Layer w0.178: v1(9.144,0.889) 9.157,0.876 13.844,0.876 13.948,0.98 13.948,1.74 CON1.3 ; U2.27 17.117,24.285 v1(17.653,23.749)
MAX30102_SCL: CON1.5 U2.25 | length 37.8
  Top Layer w0.178: v1(18.161,0.508) 21.59,0.508 23.241,2.159 23.241,4.572 22.479,5.334 20.066,5.334 18.796,6.604 v1(18.796,25.4)
  Bottom Layer w0.178: CON1.5 14.986,0.739 15.217,0.508 v1(18.161,0.508) ; U2.25 18.117,26.079 v1(18.796,25.4)
MAX30102_SDA: CON1.4 U2.26 | length 44.5
  Top Layer w0.178: v1(8.001,2.184) 7.428,2.184 7.403,2.159 6.858,2.159 6.223,2.794 6.223,4.826 6.858,5.461 17.145,5.461 18.39,6.706 v1(18.39,24.638)
  Bottom Layer w0.178: v1(8.001,2.184) 8.026,2.184 8.522,2.68 14.338,2.68 14.478,2.54 14.478,1.786 CON1.4 ; U2.26 17.617,25.436 18.39,24.663 v1(18.39,24.638)
MPU6050_INT: R14.1 U2.41 U5.12 | length 47
  Top Layer w0.178: v1(9.17,30.252) 9.17,30.225 9.221,30.174 9.221,30.149 10.16,29.21 11.049,29.21 14.605,32.766 20.828,32.766 21.971,31.623 21.971,7.874 v1(20.701,6.604)
  Bottom Layer w0.178: v1(9.17,30.252) 9.732,29.69 9.732,29.638 10.275,29.095 U2.41 ; v1(20.701,6.604) R14.1 22.362,6.614 22.362,7.923 U5.12
MPU6050_SCL: R16.1 U2.42 U5.23 | length 38.3
  Top Layer w0.178: v1(10.287,29.845) 13.716,33.274 21.844,33.274 22.733,32.385 v1(22.733,14.732)
  Bottom Layer w0.178: v1(10.287,29.845) 10.537,29.595 U2.42 ; v1(22.733,14.732) 23.241,15.24 R16.1 23.876,14.103 24.372,13.607 U5.23
MPU6050_SDA: R15.1 U2.43 U5.24 | length 39.1
  Top Layer w0.178: v1(10.033,30.988) 12.827,33.782 23.368,33.782 24.765,32.385 v1(24.765,14.351)
  Bottom Layer w0.178: v1(10.033,30.988) 10.926,30.095 U2.43 ; v1(24.765,14.351) 25.019,14.097 R15.1 24.886,13.202 24.886,12.147 U5.24
NetC1_2: C1.2 R2.1 U2.1 | length 12.5
  Top Layer w0.254: v1(7.48,31.356) 10.033,33.909 v1(10.223,33.909)
  Bottom Layer w0.254: R2.1 3.785,29.693 3.785,30.498 4.097,30.81 5.969,30.81 5.969,30.861 6.096,30.988 C1.2@6.159,30.924 ; C1.2 6.953,30.861 7.443,31.351 7.475,31.351 v1(7.48,31.356) ; v1(10.223,33.909) 11.43,33.909 12.044,33.295 U2.1
NetC18_2: C18.2 U4.1 | length 1.6
  Bottom Layer w0.254: U4.1 7.239,13.843 C18.2@7.81,14.414
NetD1_2: D1.2 R2.2 | length 2.2
  Bottom Layer w0.254: D1.2 0.889,28.448 1.397,28.956 R2.2
NetD2_1: D2.1 R8.1 | length 13.2
  Top Layer w0.178: v1(5.498,16.637) 6.731,16.637 9.144,19.05 14.605,19.05 v1(15.494,19.939)
  Bottom Layer w0.178: v1(15.494,19.939) 16.256,19.939 16.637,20.32 R8.1
NetD2_2: D2.2 D3.2 R13.1 U4.12 | length 8.8
  Bottom Layer w0.178: R13.1 2.672,17.018 3.053,16.637 D2.2 ; D3.2 D2.2 ; U4.12@3.414,12.842 U4.12 2.87,12.827 2.146,13.55 2.146,15.676 2.98,16.51 3.011,16.51 D2.2
NetD3_1: D3.1 R11.2 R12.1 RST1.2 | length 17.7
  Top Layer w0.254: RST1.2 3.048,16.092 v1(5.498,18.542) ; v1@7.405,19.172 7.488,19.172 v1(7.493,19.177) 8.128,19.812 13.716,19.812 v1(14.605,20.701)
  Bottom Layer w0.254: v1(5.498,18.542) R12.1 v1(7.493,19.177) ; v1(14.605,20.701) 15.24,20.701 R11.2
NetD4_A: D4.A R19.1 | length 12.4
  Top Layer w0.254: v1(2.159,34.544) 3.556,34.544 6.952,37.94 6.952,38.556 7.131,38.735 8.363,38.735 9.898,38.735 D4.A
  Bottom Layer w0.254: v1(2.159,34.544) R19.1
NetD4_K: D4.K R18.2 U6.7 | length 20.2
  Top Layer w0.254: v1(9.966,22.352) 11.303,23.689 11.303,26.67 8.141,29.832 8.141,31.198 10.668,33.725 D4.K
  Bottom Layer w0.254: v1(8.141,29.845) 8.141,29.838 8.128,29.825 8.128,28.702 R18.2
NetD5_A: D5.A R23.2 | length 9.8
  Top Layer w0.254: v1(1.016,35.56) 3.556,35.56 5.969,37.973 5.969,38.735 6.739,39.505 D5.A
  Bottom Layer w0.254: R23.2 v1(1.016,35.56)
NetD5_K: D5.K U6.6 | length 16.5
  Top Layer w0.178: D5.K 7.722,37.965 7.346,37.589 7.346,37.564 7.112,37.33 7.112,32.658 7.074,32.62 7.074,30.01 10.668,26.416 10.668,24.638 v1(9.652,23.622)
NetD6_A: D6.A R22.2 | length 12.8
  Bottom Layer w0.178: R22.2 9.779,40.64 9.906,40.767 20.455,40.767 v1(21.59,39.632)
NetL1_1: L1.1 U4.8 U4.9 | length 6.1
  Bottom Layer w0.254: U4.9 U4.8 3.429,9.525 5.08,7.874 L1.1
NetL1_2: L1.2 U4.6 U4.7 | length 5.9
  Bottom Layer w0.254: U4.6 U4.7 6.731,10.795 9.652,7.874 L1.2
NetR1_2: R1.2 VT1.3 | length 5.1
  Bottom Layer w0.178: VT1.3@24.765,16.884 VT1.3
  Bottom Layer w0.254: R1.2 21.082,16.637 21.354,16.909 VT1.3
NetR3_1: R3.1 R4.1 VT1.1 | length 13
  Top Layer w0.254: v1(19.202,22.733) 20.948,22.733 21.075,22.86 v1(21.082,22.86)
  Bottom Layer w0.254: R3.1 19.177,22.701 19.202,22.726 v1(19.202,22.733) ; v1(21.082,22.86) 23.815,20.127 VT1.1 23.876,19.098 23.876,18.288 24.384,17.78 27.051,17.78 27.305,17.526 27.305,17.145 R4.1
NetR9_2: R9.2 R10.1 U4.3 | length 4.7
  Bottom Layer w0.254: U4.3 7.239,12.827 7.493,13.081 ; R10.1 7.493,13.081 ; R9.2 7.493,13.081
NetR20_1: R20.1 U6.2 | length 2.5
  Bottom Layer w0.254: R20.1 2.349,22.288 4.703,22.288 U6.2
NetR24_1: R24.1 USB1.1
  other v1: 4.445,30.226
OSC32_IN: C2.2 U2.3 Y1.1 | length 9.4
  Bottom Layer w0.203: C2.2 10.632,38.572 10.632,37.083 10.712,37.003 10.712,36.659 11.049,36.322 11.684,36.322 12.573,36.322 13.059,35.836 13.059,34.535 13.617,33.977 U2.3
  Bottom Layer w0.254: 11.684,36.322 11.684,35.326 Y1.1
OSC32_OUT: C3.2 U2.4 Y1.2 | length 8
  Bottom Layer w0.203: Y1.2 13.442,37.699 13.462,37.719 ; C3.2 13.462,38.481 13.462,37.719 ; U2.4 14.117,34.016 13.44,34.693 13.44,36.487 13.462,36.509 13.462,37.719
OSC_IN: C6.2 U2.5 Y2.1 | length 6.8
  Bottom Layer w0.178: U2.5 14.617,34.037 13.808,34.846 13.808,36.334 13.83,36.356 13.83,36.429 14.65,37.249 Y2.1
  Bottom Layer w0.254: Y2.1 14.792,37.249 15.24,37.697 C6.2
OSC_OUT: C7.2 U2.6 Y2.3 | length 7.4
  Bottom Layer w0.254: U2.6 15.117,34.285 15.97,35.138 15.97,35.56 ; C7.2 16.51,38.481 16.245,38.216 16.236,38.216 15.97,37.95 15.97,35.56 ; Y2.3 16.886,35.56 15.97,35.56
Power_ON: R8.2 U2.28 | length 5.8
  Top Layer w0.178: v1(15.367,22.733) 15.367,22.76 15.621,23.014 v1(15.621,24.13)
  Bottom Layer w0.178: v1(15.367,22.733) 16.116,21.984 16.497,21.984 R8.2 ; v1(15.621,24.13) 16.617,25.126 U2.28
REGOUT: C23.2 U5.10 | length 1.4
  Bottom Layer w0.254: U5.10 23.374,7.931 23.374,6.725 C23.2
RST: C8.2 R5.1 U2.7 | length 9.5
  Bottom Layer w0.254: U2.7 15.619,33.297 15.619,34.141 16.247,34.769 16.541,34.769 17.801,34.769 18.796,35.764 18.796,38.1 ; C8.2 18.796,38.1 ; R5.1 18.796,38.1
SWCLK: U2.37 USB1.2 | length 9
  Top Layer w0.178: USB1.2 6.21,29.604 v3(6.985,28.829)
  Bottom Layer w0.178: v3(6.985,28.829) 8.719,27.095 U2.37
SWDIO: U2.34 USB1.3 | length 13.2
  Top Layer w0.178: USB1.3 5.207,28.956 v1(6.731,27.432) ; v1(11.938,25.273) 12.954,25.273 v1(13.589,24.638)
  Bottom Layer w0.178: v1(6.731,27.432) 7.62,26.543 10.668,26.543 v1(11.938,25.273) ; v1(13.589,24.638) 13.589,26.367 U2.34
TFT_BLK: R3.2 U2.31 | length 6.5
  Bottom Layer w0.178: U2.31 15.117,23.872 16.256,22.733 17.018,22.733 17.892,21.859 18.019,21.859 R3.2
TFT_CS: U1.7 U2.14 | length 28.6
  Top Layer w0.178: v1@16.637,12.9 16.637,26.797 20.828,30.988 v1(20.828,31.496)
  Bottom Layer w0.178: U1.7 14.723,14.732 v1(16.628,12.827) v1@16.637,12.827
  Bottom Layer w0.254: U2.14 18.853,32.131 18.959,32.025 20.299,32.025 v1(20.828,31.496)
TFT_DC: U1.5 U2.29 | length 9.5
  Top Layer w0.178: v1(13.323,20.689) 13.323,22.975 v1(15.621,25.273)
  Bottom Layer w0.178: U1.5 v1(13.323,20.689) v1@13.335,20.701 ; v1(15.621,25.273) 16.11,25.762 16.11,26.388 U2.29
TFT_LEDK: R1.1 U1.11 | length 5
  Bottom Layer w0.254: U1.11 17.523,16.513 17.526,16.51 17.526,16.151 17.675,16.002 19.875,16.002 20.024,15.853 20.024,15.409 R1.1
TFT_RES: U1.6 U2.33 | length 8.4
  Bottom Layer w0.178: U1.6 14.023,19.009 14.117,19.103 U2.33
TFT_SCL: U1.4 U2.15 | length 31.4
  Top Layer w0.178: v1(16.129,11.176) 16.129,27.178 v1(20.066,31.115)
  Bottom Layer w0.178: U1.4 12.573,17.984 12.573,14.859 16.11,11.322 16.11,11.195 v1(16.129,11.176) ; U2.15 19.586,31.595 v1(20.066,31.115)
TFT_SDA: U1.3 U2.17 | length 35.5
  Top Layer w0.178: v1(17.145,9.398) 17.145,26.035 v1(21.082,29.972)
  Bottom Layer w0.178: U1.3 11.923,14.62 v1(17.145,9.398) ; U2.17 20.459,30.595 v1(21.082,29.972)
USB_VCC: C26.2 R19.2 R23.1 R24.2 U6.4 U6.8 | length 30
  Top Layer w0.178: v1(0.889,31.369) 0.889,30.62 2.159,29.35 v1(2.159,27.813)
  Bottom Layer w0.178: v1(0.889,31.369) 0.889,33.401 R23.1 R19.2
  Bottom Layer w0.254: v1(2.159,27.813) 2.794,27.178 2.794,24.892 ; C26.2 2.286,24.384 2.794,24.892 ; R24.2 4.572,25.052 U6.4@4.732,24.892 ; U6.8 10.372,21.082 10.604,21.314 10.604,21.399 11.303,22.098 11.303,25.273 10.795,25.781 6.155,25.781 5.266,24.892 U6.4 U6.4@4.732,24.892 ; 2.794,24.892 U6.4@4.732,24.892
VCAP_1: C5.2 U2.22 | length 4.2
  Bottom Layer w0.254: U2.22 18.819,28.093 19.786,28.093 20.574,27.305 C5.2
pads on no net: CON1.2 CON1.6 SW1. U1.1 U1.2 U1.9 U2.10 U2.11 U2.12 U2.13 U2.16 U2.21 U2.30 U2.40 U3.1 U3.4 U4.14 U5.2 U5.3 U5.4 U5.5 U5.14 U5.15 U5.16 U5.17 U5.19 U5.21 U5.22 USB1.4 Y2.2 Y2.4
copper on no net:
  other v2: 2.032,9.949 2.032,12.149

## Polygon pours and split planes (outlines as drawn)
GND on Top Layer "GND_L01_P043" (solid, remove dead copper, pour order 43): -3.175,38.862 -3.175,38.989 2.286,44.45 38.354,44.45 42.672,40.132 42.672,2.921 35.179,-4.572 -3.302,-4.572
no net on Top Layer "NONET_L01_P035" (solid, pour order 35): -3.556,42.545
no net on Top Layer "NONET_L01_P002" (solid, pour order 2): -12.573,-5.588
GND on Bottom Layer "GND_L02_P042" (solid, remove dead copper, pour order 42): -4.826,39.37 -1.397,42.799 31.115,42.799 35.179,38.735 35.179,1.905 29.972,-3.302 -1.905,-3.302 -5.207,0 -5.207,2.159
3V3 on Bottom Layer "3V3_L02_P015" (solid, pour order 15): 12.212,23.873 12.593,23.492 12.593,21.333 12.212,20.952 12.212,20.063 11.958,19.809 11.323,19.809 11.069,20.063 11.069,20.825 11.704,21.46 11.704,23.746 11.831,23.873
3V3 on Bottom Layer "3V3_L02_P023" (solid, pour order 23): 24.384,15.494 24.384,14.986 24.638,14.732 25.146,14.732 25.527,14.351 25.527,13.081 25.654,12.954 27.813,12.954 27.94,13.081 27.94,16.256 27.813,16.383 25.654,16.383 24.892,15.621 24.511,15.621
GND on Bottom Layer "GND_L02_P013" (solid, pour order 13): 2.286,8.255 2.54,8.509 3.302,8.509 4.064,7.747 4.064,6.35 3.429,5.715 2.667,5.715 2.286,6.096
no net on Bottom Layer "NONET_L02_P033" (solid, pour order 33): -2.032,42.037
3V3 on Bottom Layer "3V3_L02_P024" (solid, pour order 24): 2.921,35.56 3.048,35.433 6.985,35.433 7.112,35.56 7.112,40.513 6.985,40.64 5.207,40.64 4.953,40.386 4.953,36.957 4.318,36.322 3.048,36.322 2.921,36.195 2.921,36.068
no net on Bottom Layer "NONET_L02_P025" (solid, pour order 25): 0.127,41.402

## Keep-outs
Keep-Out Layer:
  circle w0.152: c25.527,38.127 r1.5
  circle w0.152: c3.175,3.175 r1.5
  circle w0.152: c3.175,38.127 r1.5
  circle w0.152: c25.527,3.175 r1.5
  lines w0.152: 7.179,3.552 cw(c8.382,4.064) 7.239,4.699 21.717,4.699 ; 7.187,3.556 21.717,3.556 ccw(c20.574,4.191) 21.777,4.703
  lines w0.254: 0,2.032 ccw(c2.032,2.032) 2.032,0 26.67,0 ccw(c26.67,2.032) 28.702,2.032 28.702,39.243 ccw(c26.67,39.243) 26.67,41.275 2.032,41.275 ccw(c2.032,39.243) 0,39.243 0,2.032

## Silkscreen, mask and mechanical layers (free items; w line width, h text height)
Top Overlay:
  drawing of 446 lines, arcs and shapes, not listed
  text "@ 小 楠 孩" at 14.732,36.576 h1
  text "@ 小 楠 孩" at 16.637,16.129 h1
Mechanical 1:
  lines w0.254: -2.286,0 2.032,0 ; 0,-3.175 0,2.032

## Dimensions
0,39.243 to 28.702,39.243 on Mechanical 1
26.67,41.275 to 26.67,0 on Mechanical 1

## Text inside footprints (layer, text, board x,y; h text height)
U1: Top Overlay "1.14IPS-LCD" at 23.351,5.048 h0.76